# Altium PCB LPM_CLK.PcbDoc
Units mil, origin at the board's own origin, x right, y up, seen from the top; angles counter-clockwise.
Board outline 3125 x 1317.5 mil, 2 copper layers (Top Layer, Bottom Layer); 39 components, 23 nets, 154 pads, 138 vias.
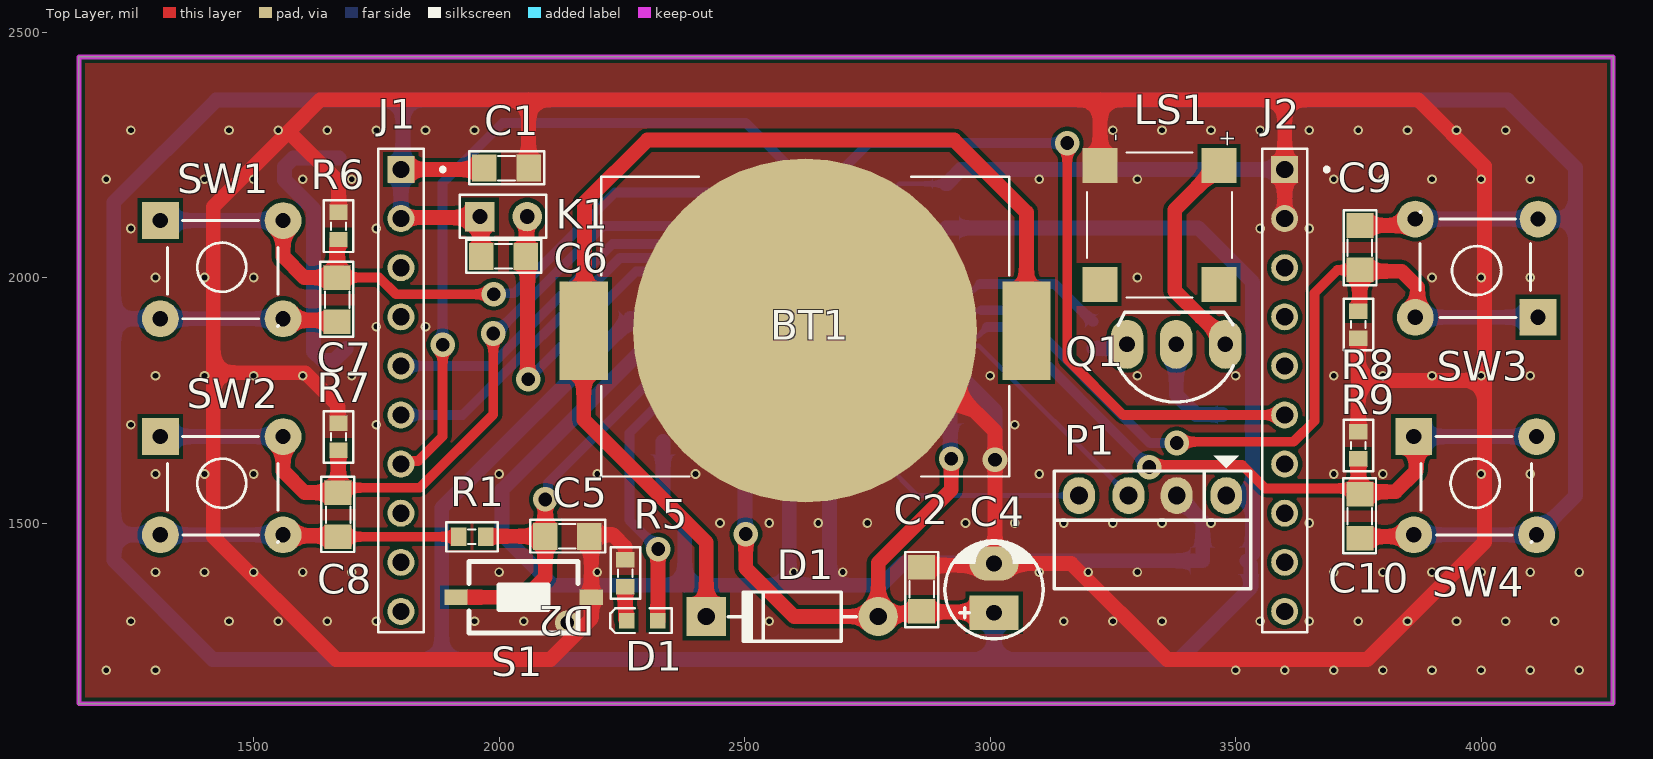
[diagram p0: Top Layer view]
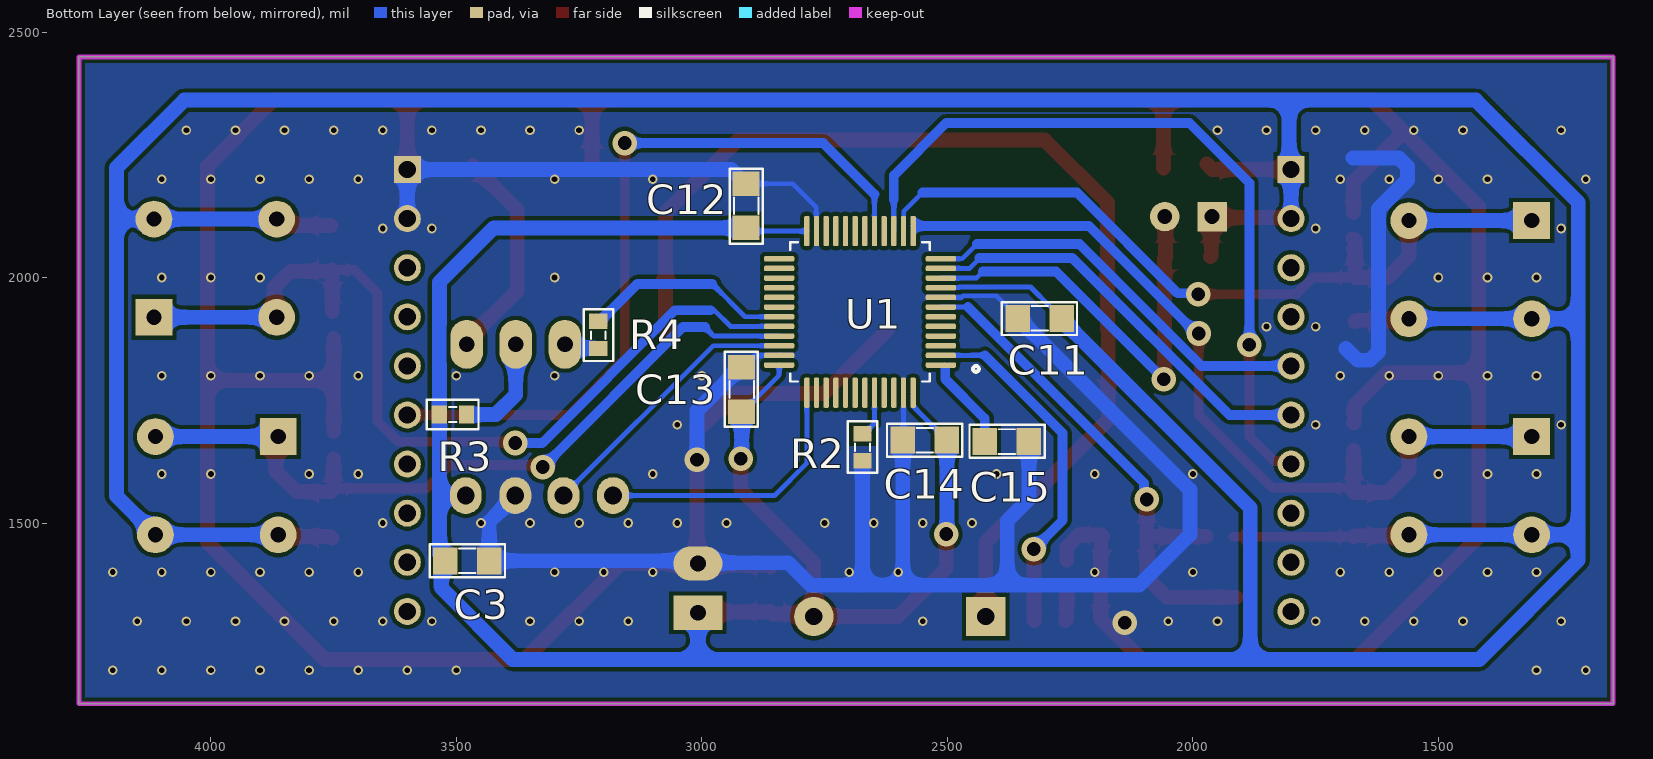
[diagram p1: Bottom Layer view, seen from below]
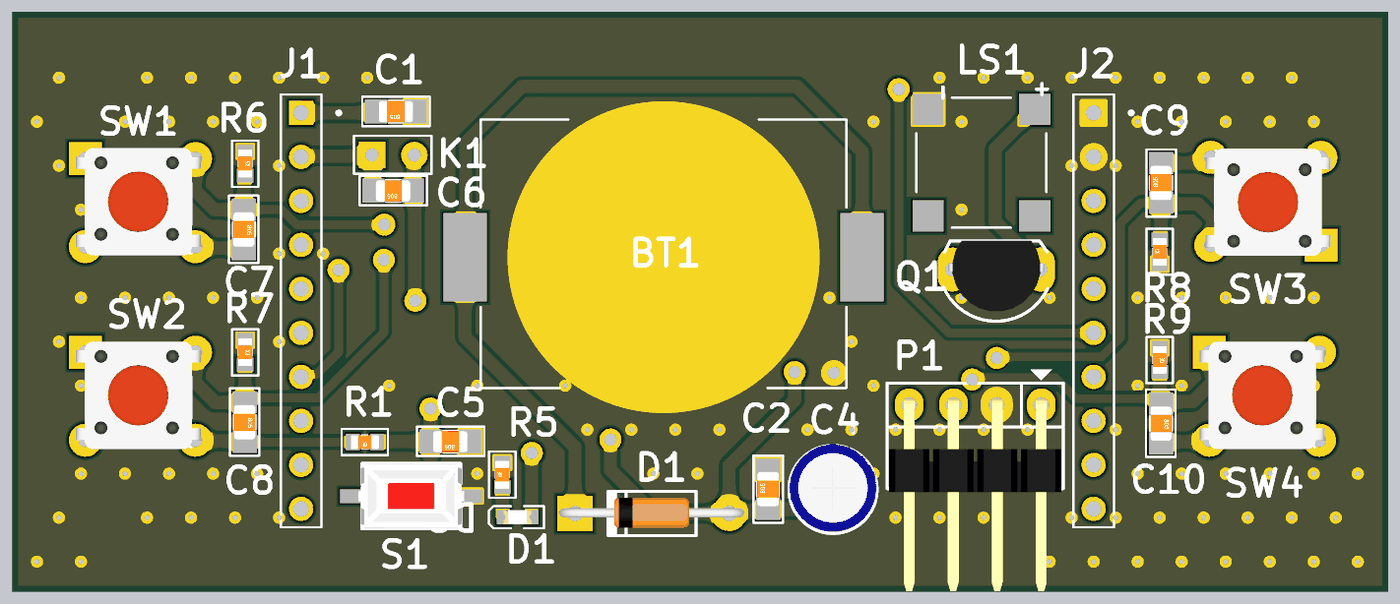
[diagram p2: 3D render of the assembled board from above, using the file's embedded part models]
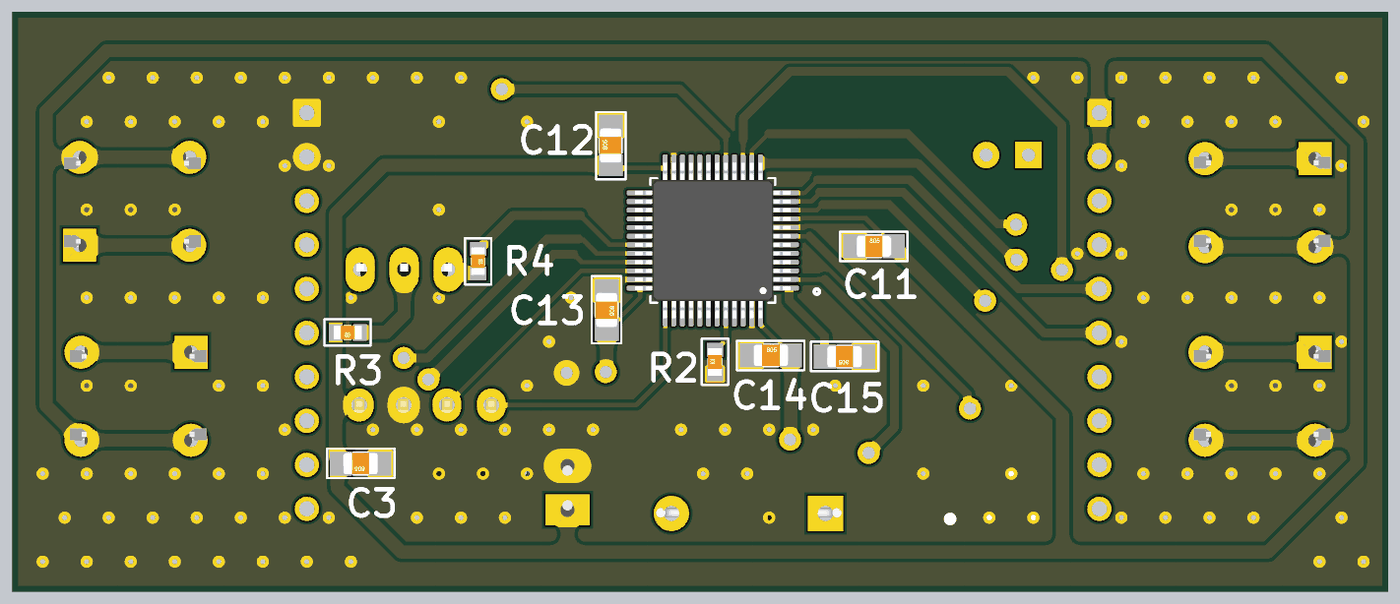
[diagram p3: 3D render of the assembled board from below, using the file's embedded part models]

## Layer stack, top to bottom
Top Solder: solder mask 0.4, Solder Resist, Dk 3.5
Top Layer: signal copper 1.4
Dielectric 1: dielectric 12.6, FR-4, Dk 4.8
Bottom Layer: signal copper 1.4
Bottom Solder: solder mask 0.4, Solder Resist, Dk 3.5

## Board outline
1144,1132 1144,2449.5 4269,2449.5 4269,1132

## Design rules (kind name [scope] priority, off if disabled: settings)
Clearance [All] p1: gap=8 ignorepadtopadclearanceinfootprint=TRUE
PlaneConnect [All] p1: planeconnectstyle=Direct reliefexpansion=20 reliefentries=4 reliefconductorwidth=10 reliefairgap=10
PolygonConnect [All] p1: connectstyle=Direct reliefconductorwidth=10 reliefentries=4 polygonreliefangle="90 Angle" airgapwidth=10
RoutingVias [All] p1: holewidth=31.5 width=59.06 viastyle="Through Hole" minholewidth=31.5 minwidth=59.06 maxholewidth=31.5 maxwidth=59.06
SolderMaskExpansion [All] p1: expansion=4 istentingtop=FALSE
Width [All] p1: maxlimit=30 minlimit=10 preferedwidth=20
29 further rules are at their usual default settings.

## Components (designator, comment, footprint, x,y, rotation, side; value= is the part's Value field where it differs from the comment)
BT1 "BAT-HLD-001" BAT_BAT-HLD-001 2623.21,1892 r180 top
C1 "Cap Non-Pol SMD" CAP-SM-0805 2060,2223 r180 top value=104
C2 "Cap Non-Pol SMD" CAP-SM-0805 2860.5,1320 r90 top value=104
C3 "Cap Non-Pol SMD" CAP-SM-0805 3433,1423 r0 bottom value=104
C4 "Cap Pol" CP1/2 3008,1317.5 r90 top value=105
C5 "Cap Non-Pol SMD" CAP-SM-0805 2184,1473 r180 top value=105
C6 "Cap Non-Pol SMD" CAP-SM-0805 2054,2043 r180 top value=105
C7 "Cap Non-Pol SMD" CAP-SM-0805 1670,2000 r270 top value=105
C8 "Cap Non-Pol SMD" CAP-SM-0805 1672,1562 r270 top value=105
C9 "Cap Non-Pol SMD" CAP-SM-0805 3753,2016 r90 top value=105
C10 "Cap Non-Pol SMD" CAP-SM-0805 3753,1559 r270 top value=105
C11 "Cap Non-Pol SMD" CAP-SM-0805 2357,1917 r180 bottom value=104
C12 "Cap Non-Pol SMD" CAP-SM-0805 2910,2101 r90 bottom value=104
C13 "Cap Non-Pol SMD" CAP-SM-0805 2919,1817 r270 bottom value=104
C14 "Cap Non-Pol SMD" CAP-SM-0805 2591,1669 r180 bottom value=104
C15 "Cap Non-Pol SMD" CAP-SM-0805 2334,1666 r0 bottom value=104
D1 "Diode" D1A 2772,1309.5 r0 top
D2 "LED SMD" LED_0603_Blue 2291.5,1301 r180 top
J1 "1-87224-0" TE_1-87224-0 1800,1770 r270 top
J2 "1-87224-0" TE_1-87224-0 3600,1770 r270 top
K1 "SW520" SW520D 2008.21,2124.21 r0 top
LS1 "CMT-7525-80-SMT-TR" XDCR_CMT-7525-80-SMT-TR 3345,2107 r270 top
P1 "Header 4H" JP4H 3481,1556 r180 top
Q1 "C1815" QTO-92 3379,1864 r180 top
R1 "RESISTOR SMD" RES-SM-0603 1972,1472 r180 top value=10K
R2 "RESISTOR SMD" RES-SM-0603 2673,1627 r90 bottom value=10K
R3 "RESISTOR SMD" RES-SM-0603 3480,1721 r0 bottom value=100
R4 "RESISTOR SMD" RES-SM-0603 3211,1910 r270 bottom value=1K
R5 "RESISTOR SMD" RES-SM-0603 2257,1370.32 r90 top value=560
R6 "RESISTOR SMD" RES-SM-0603 1673,2132 r270 top value=10K
R7 "RESISTOR SMD" RES-SM-0603 1673,1703 r270 top value=10K
R8 "RESISTOR SMD" RES-SM-0603 3750,1877 r90 top value=10K
R9 "RESISTOR SMD" RES-SM-0603 3750,1685.56 r270 top value=10K
S1 "Tact SW - 2Pin" SW-SMD 2050,1349 r180 top
SW1 "SW" "Tact SW 4 pin" 1310,2116 r0 top value="Button chip 4 pin"
SW2 "SW" "Tact SW 4 pin" 1310,1676 r0 top value="Button chip 4 pin"
SW3 "SW" "Tact SW 4 pin" 4116,1919 r180 top value="Button chip 4 pin"
SW4 "SW" "Tact SW 4 pin" 3863,1676 r0 top value="Button chip 4 pin"
U1 "STM32F103C8T6" QFP50P900X900X160-48N 2678,1929.99 r0 bottom

## Footprints (in the part's own frame and the unit in brackets; to place one, negate y for a bottom-side part, rotate by r counter-clockwise, add the part's x,y. Pads: shape width x height; smd on the part's side, far side on the other; paste and mask are expansions set on the pad)
BAT_BAT-HLD-001 [mm]
  round 17.8 smd paste-10: N1(0,0)
  rect 2.5x5.1 smd: P1(-11.45,0) P2(11.45,0)
  silkscreen extent -10.55,-7.95 10.55,7.55
CAP-SM-0805 [mil]
  rect 50x55 smd: 1(0,0) 2(90,0)
  silkscreen extent -32,-34 121,33, body extent 6,-25 84,25, height 31
CP1/2 [mil] "Tu hoa < 22uF/16>50V"
  rect 70x100 hole 32: 1(0,0)
  oval 70x100 hole 32: 2(100,0)
  silkscreen extent -53,-100 146,100, body extent -49,-99 149,99, height 287
D1A [mil] "Diode 1N4007, W 100mil, L 350mil"
  round 80 hole 35: 1(0,0)
  rect 80x80 hole 35: 2(-350,0)
  silkscreen extent -305,-50 -45,50, body extent -386,-33 34,36, height 84
JP4H [mil]
  oval 65x75 hole 36: 1(0,0) 2(101,0) 3(199,0) 4(300,0)
  silkscreen extent -50,-81 350,190, body extent -46,-15 346,424, height 99
LED_0603_Blue [mm] "Chip LED, 2-Leads, Body 1.6x0.8mm, IPC Medium Density"
  rect 0.8x0.8 smd: 1(-0.8,0) 2(0.8,0)
  silkscreen extent -1.52,-0.64 1.65,0.64, body extent -0.8,-0.4 0.8,0.4, height 0.7
QFP50P900X900X160-48N [mm]
  rrect50% 1.56x0.28 smd: 1(-4.18,2.75) 2(-4.18,2.25) 3(-4.18,1.75) 4(-4.18,1.25) 5(-4.18,0.75) 6(-4.18,0.25) 7(-4.18,-0.25) 8(-4.18,-0.75) 9(-4.18,-1.25) 10(-4.18,-1.75) 11(-4.18,-2.25) 12(-4.18,-2.75) 25(4.18,-2.75) 26(4.18,-2.25) 27(4.18,-1.75) 28(4.18,-1.25) 29(4.18,-0.75) 30(4.18,-0.25) 31(4.18,0.25) 32(4.18,0.75) 33(4.18,1.25) 34(4.18,1.75) 35(4.18,2.25) 36(4.18,2.75)
  rrect50% 0.28x1.56 smd: 13(-2.75,-4.18) 14(-2.25,-4.18) 15(-1.75,-4.18) 16(-1.25,-4.18) 17(-0.75,-4.18) 18(-0.25,-4.18) 19(0.25,-4.18) 20(0.75,-4.18) 21(1.25,-4.18) 22(1.75,-4.18) 23(2.25,-4.18) 24(2.75,-4.18) 37(2.75,4.18) 38(2.25,4.18) 39(1.75,4.18) 40(1.25,4.18) 41(0.75,4.18) 42(0.25,4.18) 43(-0.25,4.18) 44(-0.75,4.18) 45(-1.25,4.18) 46(-1.75,4.18) 47(-2.25,4.18) 48(-2.75,4.18)
  silkscreen extent -6.15,-3.6 3.6,3.6, body extent -4.5,-4.5 4.5,4.5, height 1.6
QTO-92 [mil] "TO-92"
  oval 66x100 hole 32: 1(-100,0) 2(0,0) 3(100,0)
  silkscreen extent -117,-65 120,118, body extent -109,-66 109,95, height 245
RES-SM-0603 [mm]
  rect 0.8x0.95 smd: 1(-0.014,0) 2(1.386,0)
  silkscreen extent -0.64,-0.76 2.03,0.76, body extent -0.11,-0.4 1.49,0.4, height 0.3
SW520D [mil]
  rect 60x60 hole 30: 0(-47.24,0)
  round 60 hole 30: 1(49,0)
  silkscreen extent -88,-43 88,44
SW-SMD [mm] "Switch SMD type"
  rect 1.2x0.8 smd: 1(-3.5,0) 2(3.5,0)
  silkscreen extent -2.82,-1.85 2.82,1.85, body extent -3.05,-1.85 3.05,1.85, height 2.5
"Tact SW 4 pin" [mil] "SW button 4pin, 250 x250 mil"
  rect 75x75 hole 31: 1(0,0)
  round 75 hole 31: 2(250,-200) 3(250,0) 4(0,-200)
  silkscreen extent 15,-215 240,0, body extent -36,-220 276,24, height 276
TE_1-87224-0 [mil]
  rect 55x55 hole 35: 1(-450,0)
  round 55 hole 35: 2(-350,0) 3(-250,0) 4(-150,0) 5(-50,0) 6(50,0) 7(150,0) 8(250,0) 9(350,0) 10(450,0)
  silkscreen extent -492,-46 492,89
XDCR_CMT-7525-80-SMT-TR [mm]
  rect 1.8x1.8 smd: 1(3.075,3.075) 2(3.075,-3.075) N(-3.075,-3.075) P(-3.075,3.075)
  silkscreen extent -3.75,-3.75 3.75,3.75

## Part data
BT1: "Battery Retainer Coin, 20.0mm 1 Cell SMD (SMT) Tab", Package=None, Availability=Unavailable, MP=BAT-HLD-001, Price=None
C1 C2 C3 C5 C6 C7 C8 C9 C10 C11 C12 C13 C14 C15: "Capacitor"
C4: "Polarized Capacitor (Radial)"
D1: "Default Diode"
D2: "LED"
J1 J2: "Connector Unshrouded Header 10 Position 2.54mm Solder Straight Thru-Hole", Package=None, Availability=Unavailable, Centerline_Pitch="2.54 mm[.1 in]", EU_RoHS_Compliance=Compliant, MF="TE Connectivity", MP=1-87224-0, Number_of_Positions=10, Price=None, Product_Type=Connector, SnapEDA_Link=https://www.snapeda.com/parts/1-87224-0/TE%20Connectivity%20AMP%20Connectors/view-part/506807/?ref=snap
K1: library part SW520D
LS1: "7.5 mm, 3.6 Vo-p, 80 dB, Surface Mount (SMT), Magnetic Audio Transducer Buzzer", Package="CUI Devices", Check_prices=https://www.snapeda.com/parts/CMT-7525-80-SMT-TR/CUI+Devices/view-part/?ref=eda, CUI_purchase_URL=https://www.cuidevices.com/product/audio/buzzers/audio-transducers/cmt-7525-80-smt-tr?utm_source=snapeda.com&utm_medium=referral&utm_campaign=snapedaBOM, Digi-Key_Part_Number=102-CMT-7525-80-SMT-TR-ND, MF="CUI Devices", MP=CMT-7525-80-SMT-TR, Purchase-URL=https://pricing.snapeda.com/search/part/CMT-7525-80-SMT-TR/?ref=eda, SnapEDA_Link=https://www.snapeda.com/parts/CMT-7525-80-SMT-TR/CUI+Devices/view-part/?ref=snap
P1: "Header, 4-Pin, Right Angle", LatestRevisionDate=17-Jul-2002, LatestRevisionNote="Re-released for DXP Platform.", Publisher="Altium Limited"
Q1: "NPN Bipolar Transistor"
R1 R2 R3 R4 R5 R6 R7 R8 R9: "Resistor"
S1: "Switch button 2 pin"
SW1 SW2 SW3 SW4: library part "Tact SW - 4Pin", "Switch button 4 pin"
U1: "ARMÂ® CortexÂ®-M3 STM32F1 Microcontroller IC 32-Bit 72MHz 64KB (64K x 8) FLASH 48-LQFP (7x7)", Package="LQFP-48 STMicroelectronics", Availability="In Stock", Check_prices=https://www.snapeda.com/parts/STM32F103C8T6/STMicroelectronics/view-part/?ref=eda, MF=STMicroelectronics, MP=STM32F103C8T6, Price=None, Purchase-URL=https://pricing.snapeda.com/search/part/STM32F103C8T6/?ref=eda, SnapEDA_Link=https://www.snapeda.com/parts/STM32F103C8T6/STMicroelectronics/view-part/?ref=snap

## Via types
v1: diameter 19.68, hole 11.81, Top Layer to Bottom Layer, 125 vias
v2: diameter 50, hole 28, Top Layer to Bottom Layer, 12 vias
v3: diameter 50, hole 28, Top Layer to Bottom Layer, tented top, 1 vias

## Nets (pads, with @x,y where several pads share a name; then routed paths per layer and width w, separated by ;. In a path a pad name is that pad's centre, name@x,y a point inside that pad or via, vN(x,y) a via of type N, cw(c..) or ccw(c..) an arc to the next point about the centre after c; other vN are vias at no path point)
3V3: C1.2 C2.1 C3.2 C4.1 C6.2 C7.2 C8.2 C9.2 C10.2 C11.2 C12.1 C13.2 C14.2 D1.1 J1.1 J1.2 K1.0 P1.1 R1.2 R3.2 SW1.2 SW1.4 SW2.2 SW2.4 SW3.2 SW3.4 SW4.2 SW4.4 U1.9 U1.24 U1.36 U1.48 | length 13985.5
  Top Layer w20: C8.2 1915.44,1472 1916.44,1471 R1.2
  Top Layer w30: SW2.2 1562,1474 1670,1474 C8.2 ; SW1.2 1563,1913 1667,1913 C7.2 ; J1.1 1960.5,2220 C1.2@1972,2231.5 ; J1.2@1806.76,2120 J1.2 1802.1,2122.1 1958.86,2122.1 K1.0 1962.48,2122.69 1962.48,2044.52 C6.2 ; v2(2502.5,1477.5) 2502.5,1408 2601,1309.5 D1.1 ; v2(2921,1631) 2921,1568 2772,1419 D1.1 ; C4.1 3006.75,1318.75 2861.75,1318.75 C2.1 2855.25,1314.75 2777.25,1314.75 D1.1 ; C10.2 3756.5,1472.5 3859.5,1472.5 SW4.4 ; C9.2@3755.5,2106 3840.82,2106 3853.82,2119 SW3.2
  Bottom Layer w10: C11.2 2267,1919.5 2287,1939.5 2289.5,1939.5 2330.83,1980.83 2475.32,1980.83 2476.43,1979.71 2512.92,1979.71 U1.9 ; C14.2 2501,1671.5 2521,1691.5 2523.5,1691.5 2569.22,1737.22 2569.22,1764.91 U1.48 ; U1.24 2903.56,2094.56 C12.1 ; U1.36 2842.57,1800.93 2916.5,1727 C13.2
  Bottom Layer w30: SW2.2 SW2.4 1215,1476 ; SW1.2 SW1.4 1215,1916 ; J1.2@1804.78,2115.22 J1.2 J1.1 1804,2224 1804,2361.5 ; C11.2 2267,1914.5 1883.38,1530.88 1883.38,1222 ; v2@2500.5,1487 2501,1487.5 C14.2 ; D1.1@2768.57,1306.07 D1.1 ; C12.1 3424,2101 3534.56,1990.44 3534.56,1904.64 3535,1904.2 3535,1823.8 3534.56,1823.36 R3.2 3534.56,1554.5 ; C13.2 2919,1633 v2(2921,1631) ; C4.1 3008,1222 ; P1.1@3481,1553.11 P1.1@3487.7,1546.41 ; P1.1 3482.5,1554.5 3534.56,1554.5 ; C3.2 3531.07,1414.93 3531.07,1368.07 3385,1222 3008,1222 ; C3.2@3534.56,1437.06 3534.56,1554.5 ; SW4.4@3854.39,1467.39 SW4.4 SW4.2 4192.46,1555.46 4192.46,2119 ; SW3.2 SW3.4 4192.46,2119 ; 4189.88,2226.12 4054.5,2361.5 1804,2361.5 ; 4192,2224 4192.46,2223.54 4192.46,2119 ; 1215,1476 1215,1916 ; 1215,1476 1215,1424 1417,1222 1883.38,1222 ; 1215,1916 1215,2153 1423.5,2361.5 1804,2361.5 ; 1883.38,1222 3008,1222
BUTTON1: C7.1 R6.2 SW1.1 SW1.3 U1.14 | length 1611.1
  Top Layer w20: C7.1 1755.65,2000 1789.65,1966 v2(1989,1966) ; R6.2 R6.2@1678.75,2083.19
  Top Layer w30: SW1.3 1560,2043 1603,2000 C7.1 ; C7.1@1670,2003 1670,2076.69 1670.75,2077.44 R6.2
  Bottom Layer w10: 2551,2173 2588.91,2135.09 2588.91,2095.07 U1.14
  Bottom Layer w20: v2(1989,1966) 1990.89,1967.89 2030.89,1967.89 2236,2173 2551,2173
  Bottom Layer w30: SW1.1 SW1.3
BUTTON2: C8.1 R7.2 SW2.1 SW2.3 U1.13 | length 1751.9
  Top Layer w20: C8.1 1682,1572 1839,1572 1988,1721 v2(1988,1886)
  Top Layer w30: SW2.3 1560,1606 1604,1562 C8.1 1672.5,1562.5 1672.5,1576 1672.5,1647.94 R7.2
  Bottom Layer w20: v2(1988,1886) 1992.88,1886 2211.88,2105 U1.13@2565.24,2105
  Bottom Layer w30: SW2.1 SW2.3
BUTTON3: C9.1 R8.2 SW3.1 SW3.3 U1.32 | length 1858.8
  Top Layer w20: v2(3380,1663) 3382.5,1665.5 3618,1665.5 3660.5,1708 3660.5,1968.63 3707.22,2015.34 3752.34,2015.34 C9.1
  Top Layer w30: R8.2@3753,1930.81 C9.1 3756.07,2012.93 3838.07,2012.93 3870.66,1980.34 3870.66,1923.66 SW3.3
  Bottom Layer w10: U1.32 2941.79,1900.46 2974.82,1933.5
  Bottom Layer w20: 2982,1933.5 3054.5,1933.5 3325,1663 v2(3380,1663)
  Bottom Layer w30: SW3.3 SW3.1
BUTTON4: C10.1 R9.2 SW4.1 SW4.3 U1.33 | length 1576.3
  Top Layer w20: v2(3324,1614) 3328,1618 3513.42,1618 3560.92,1570.5 3741.5,1570.5 C10.1
  Top Layer w30: C10.1@3750,1569 R9.2 ; C10.1@3755.5,1563.5 3825.5,1563.5 3868,1606 3868,1671 SW4.1
  Bottom Layer w10: U1.33 2975.78,1880.78 2994,1899
  Bottom Layer w20: 2994,1899 3039,1899 v2(3324,1614)
  Bottom Layer w30: SW4.1 SW4.3
BUZZER: R4.1 U1.31 | length 427.8
  Bottom Layer w10: U1.31 2912.15,1920.15 2979,1987
  Bottom Layer w20: 2979,1987 3131.61,1987 3208.05,1910.56 R4.1
GND: BT1.N1 C1.1 C2.2 C3.1 C4.2 C5.1 C11.1 C12.2 C13.1 C14.1 C15.1 J2.1 J2.2 LS1.N P1.2 R2.1 R5.2 R6.1 R7.1 R8.1 R9.1 S1.1 U1.8 U1.23 U1.35 U1.47 | length 14210.9
  Top Layer w30: R7.1 1671.92,1703.56 1671.18,1704.31 1671.18,1739.82 1605,1806 1418,1806 ; R6.1 1673,2195 1571,2297 ; C1.1 2060,2362 ; R5.2 2257,1451 2232,1476 2187,1476 C5.1 2187.8,1469.2 S1.1 2187.8,1305.3 2104.5,1222 1668,1222 1418,1472 1418,1806 ; BT1.N1 2751.56,1763.65 2933.08,1763.65 3010,1686.73 C4.2@3010,1419.5 ; C2.2 2864.25,1413.75 3004.25,1413.75 C4.2 3165,1417.5 3360.5,1222 3768,1222 4007,1461 4007,1790.5 ; LS1.N@3224,2228.13 3224,2362 ; J2.2 J2.1 3600,2362 ; R9.1 3750,1790.5 ; R8.1 3750,1790.5 ; 1418,1806 1418,2144 1571,2297 ; 1571,2297 1636,2362 2060,2362 ; 2060,2362 3224,2362 ; 3224,2362 3600,2362 ; 3600,2362 3872,2362 4007,2227 4007,1790.5 ; 3750,1790.5 4007,1790.5
  Bottom Layer w10: C11.1 2357,1919.5 2400.33,1962.83 2467.86,1962.83 2471.17,1959.52 U1.8 ; U1.47 2589.42,1670.58 C14.1 ; U1.23 2767.09,2095.07 2767.09,2143.09 2815,2191 C12.2 ; U1.35@2842.06,1841.92 U1.35 2892.09,1841.41 2916.5,1817 C13.1
  Bottom Layer w30: 1674,2243.5 1580.5,2243.5 1562.93,2225.93 1562.93,2198.63 1622,2139.56 1622,1849 1639.57,1831.43 1664.43,1831.43 1688.5,1855.5 ; C15.1 2334,1548.75 2378,1504.75 2378,1373 ; C11.1@2350.25,1911.75 2006,1567.5 2006,1476 2109,1373 2378,1373 ; C14.1 2591,1373 ; R2.1 2673,1373 ; C12.2 2912.5,2191 2922.5,2201 2922.5,2202.43 2940.07,2220 J2.1 J2.2 ; C13.1 2921.5,1817 3010,1728.5 v2(3010,1629.01) ; P1.2@3379,1575 P1.2@3380.5,1573.5 ; P1.2 3433,1503 C3.1 2977,1423 2973,1419 2824,1419 2778,1373 2673,1373 ; 2378,1373 2591,1373 ; 2591,1373 2673,1373
  other v1: 1200,1200 1300,1200 3500,1200 3600,1200 3700,1200 3800,1200 3900,1200 4000,1200 4100,1200 4200,1200 1250,1300 1450,1300 1550,1300 1650,1300 1750,1300 1950,1300 2050,1300 2550,1300 3150,1300 3250,1300 3350,1300 3550,1300 3650,1300 3750,1300 3850,1300 3950,1300 4050,1300 4150,1300 1300,1400 1400,1400 1500,1400 1600,1400 1700,1400 2000,1400 2200,1400 2600,1400 2700,1400 3100,1400 3200,1400 3300,1400 3700,1400 3800,1400 3900,1400 4000,1400 4100,1400 4200,1400 2450,1500 2550,1500 2650,1500 2750,1500 2950,1500 3050,1500 3150,1500 3250,1500 3350,1500 3450,1500 3650,1500 1300,1600 1400,1600 1500,1600 2000,1600 2200,1600 2400,1600 3100,1600 3700,1600 3800,1600 4000,1600 4100,1600 1250,1700 1750,1700 3050,1700 1300,1800 1400,1800 1500,1800 1600,1800 1700,1800 3000,1800 3300,1800 3500,1800 3700,1800 3800,1800 3900,1800 4000,1800 4100,1800 1750,1900 1850,1900 1300,2000 1400,2000 1500,2000 3300,2000 3900,2000 4000,2000 4100,2000 1250,2100 1750,2100 3550,2100 3650,2100 1200,2200 1400,2200 1500,2200 1600,2200 1700,2200 3100,2200 3300,2200 3700,2200 3800,2200 3900,2200 4000,2200 4100,2200 1250,2300 1450,2300 1550,2300 1650,2300 1750,2300 1850,2300 1950,2300 3250,2300 3350,2300 3450,2300 3550,2300 3650,2300 3750,2300 3850,2300 3950,2300 4050,2300
  other v3: 2139,1297
LCD_EN: J1.5 U1.12 | length 828.5
  Bottom Layer w10: 2440,2068 2469.74,2038.26 U1.12
  Bottom Layer w20: J1.5 1982.81,1820 2230.81,2068 2440,2068
LED: D2.1 U1.2 | length 720.5
  Top Layer w30: D2.1 2323.5,1301.5 2323.5,1446.5 v2(2324,1447)
  Bottom Layer w10: 2423.41,1841.41 U1.2
  Bottom Layer w20: v2(2324,1447) 2265.5,1505.5 2265.5,1683.5 2423.41,1841.41
NetBT1_P1: BT1.P1 BT1.P2 D1.2 | length 2201.7
  Top Layer w30: D1.2 2422,1460.75 2172.43,1710.32 BT1.P2 2173.82,1893.39 2173.82,2152.32 2301.5,2280 2927,2280 3074,2133 BT1.P1
NetD2_2: D2.2 R5.1 | length 73
  Top Layer w30: R5.1@2259.95,1369.76 R5.1 2257,1304.01 D2.2
NetLS1_P: LS1.P Q1.1 | length 445
  Top Layer w30: LS1.P 3376,2138 3376,1972.61 3428.84,1919.76 3430.49,1919.76 3479,1871.26 Q1.1
NetQ1_2: Q1.2 R3.1 | length 213.8
  Bottom Layer w30: Q1.2 3379,1761.5 3419.5,1721 R3.1@3473.54,1721
NetQ1_3: Q1.3 R4.2 | length 71.5
  Bottom Layer w30: R4.2 3211.75,1856.19 3271.19,1856.19 Q1.3
NetR2_2: R2.2 U1.44 | length 95.8
  Bottom Layer w10: U1.44 2648.47,1703.13 2670.05,1681.56 R2.2
RESET: C5.2 R1.1 S1.2 U1.7 | length 1076.6
  Top Layer w30: S1.2 2053,1349 2094,1390 C5.2 ; R1.1 1972.56,1472.25 1973.31,1473 C5.2 ; v2(2094,1548) C5.2
  Bottom Layer w10: 2458.33,1939.83 U1.7
  Bottom Layer w20: v2(2094,1548) 2099.74,1553.74 2099.74,1581.24 2458.33,1939.83
SPI_CLK: J1.7 U1.15 | length 1556.8
  Top Layer w20: J1.7 1806.16,1626.16 1835.16,1626.16 1885,1676 v2(1885,1863)
  Bottom Layer w10: U1.15 2609.1,2159.1
  Bottom Layer w20: v2(1885,1863) 1885,2192.5 2007,2314.5 2502.5,2314.5 2609.1,2207.9 2609.1,2159.1
SPI_CS: J1.6 U1.11 | length 856
  Bottom Layer w10: 2435,2040 2435,2038 2454.43,2018.57 U1.11
  Bottom Layer w20: J1.6 1925.69,1720 2245.69,2040 2435,2040
SPI_MOSI: J2.6 U1.17 | length 1557
  Top Layer w20: v2(3157.2,2273.93) 3157.2,1833.8 3271,1720 J2.6
  Bottom Layer w10: U1.17 2648.47,2169.47
  Bottom Layer w20: 2648.47,2169.47 2752.93,2273.93 v2(3157.2,2273.93)
SWDCLK: P1.4 U1.37 | length 565.7
  Bottom Layer w10: U1.37 2786.27,1621.73 2852,1556 P1.4
SWDIO: P1.3 U1.34 | length 565.8
  Bottom Layer w10: U1.34 2976.91,1861.09 P1.3
VBAT: C15.2 U1.1 | length 184.6
  Bottom Layer w20: C15.2 2424,1713 2504.44,1793.44 U1.1@2504.44,1817.23
WKUP: C6.1 K1.1 U1.10 | length 884.9
  Top Layer w30: K1.1 2055.6,2122.6 2055.6,2044.6 C6.1 2058.02,2038.98 2058.02,1794.48 v2(2059.5,1793)
  Bottom Layer w10: 2428,2012 2441.11,1998.89 U1.10
  Bottom Layer w20: v2(2059.5,1793) 2278.5,2012 2428,2012
pads on no net: J1.3 J1.4 J1.8 J1.9 J1.10 J2.3 J2.4 J2.5 J2.7 J2.8 J2.9 J2.10 LS1.1 LS1.2 U1.3 U1.4 U1.5 U1.6 U1.16 U1.18 U1.19 U1.20 U1.21 U1.22 U1.25 U1.26 U1.27 U1.28 U1.29 U1.30 U1.38 U1.39 U1.40 U1.41 U1.42 U1.43 U1.45 U1.46

## Polygon pours and split planes (outlines as drawn)
GND on Top Layer "GND_L01_P000" (solid, remove dead copper, pour order 0): 1144,1132 1144,2449.5 4269,2449.5 4269,1132
GND on Bottom Layer "GND_L02_P003" (solid, remove dead copper, pour order 3): 1144,1132 1144,2449.5 4269,2449.5 4269,1132

## Keep-outs
Keep-Out Layer:
  the board outline again, w10

## Silkscreen, mask and mechanical layers (free items; w line width, h text height)
Top Overlay:
  text "D1" at 2257,1199.5 h60

## Text inside footprints (layer, text, board x,y; h text height)
LS1: Top Overlay "-" at 3245,2292.63 h32 r270; Top Overlay "+" at 3470,2300.5 h32 r270; Mechanical 13 "+" at 3470,2300.5 h32 r270; Mechanical 13 "-" at 3245,2292.63 h32 r270